# Altium PCB PCB_ESP32-C3-WROOM-02_V1.6_20210209.PcbDoc
Units mil, origin at the board's own origin, x right, y up, seen from the top; angles counter-clockwise.
Board outline 708.66 x 787.4 mil, 4 copper layers (Top, Gnd, Power, Bottom), stack 35.4 mil thick; 45 components, 37 nets, 111 pads, 172 vias.
Unrouted connection lines stored in the file: 147.
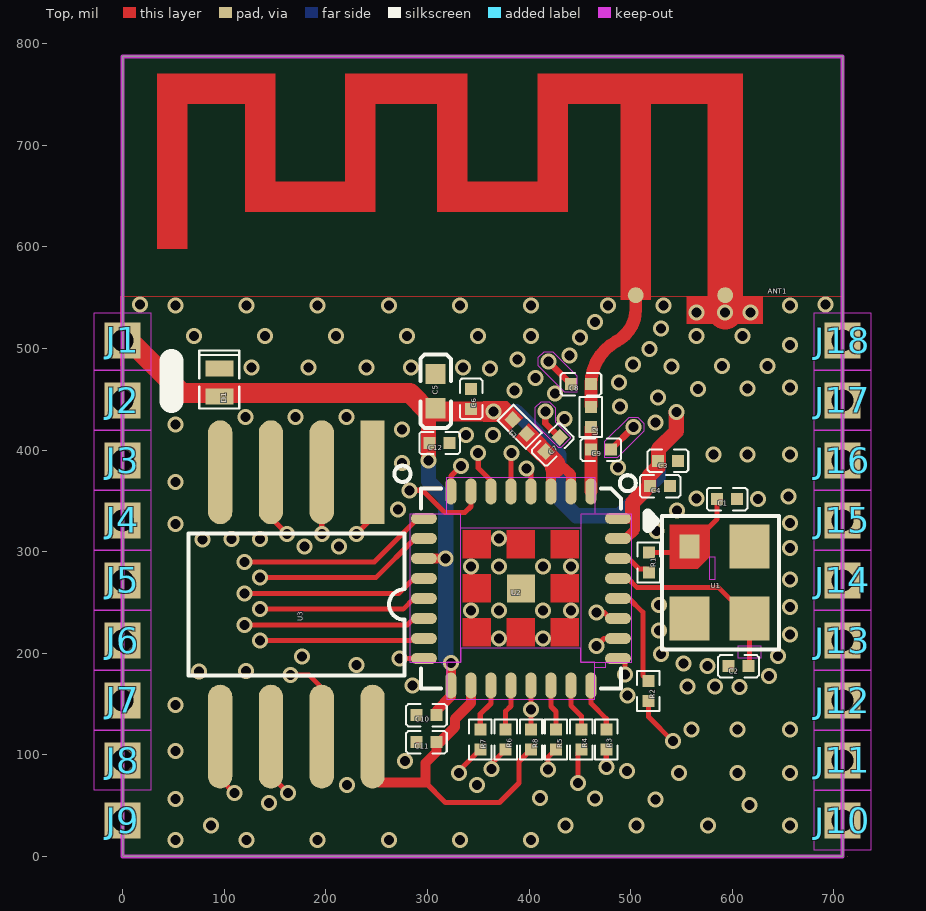
[diagram p0: Top view]
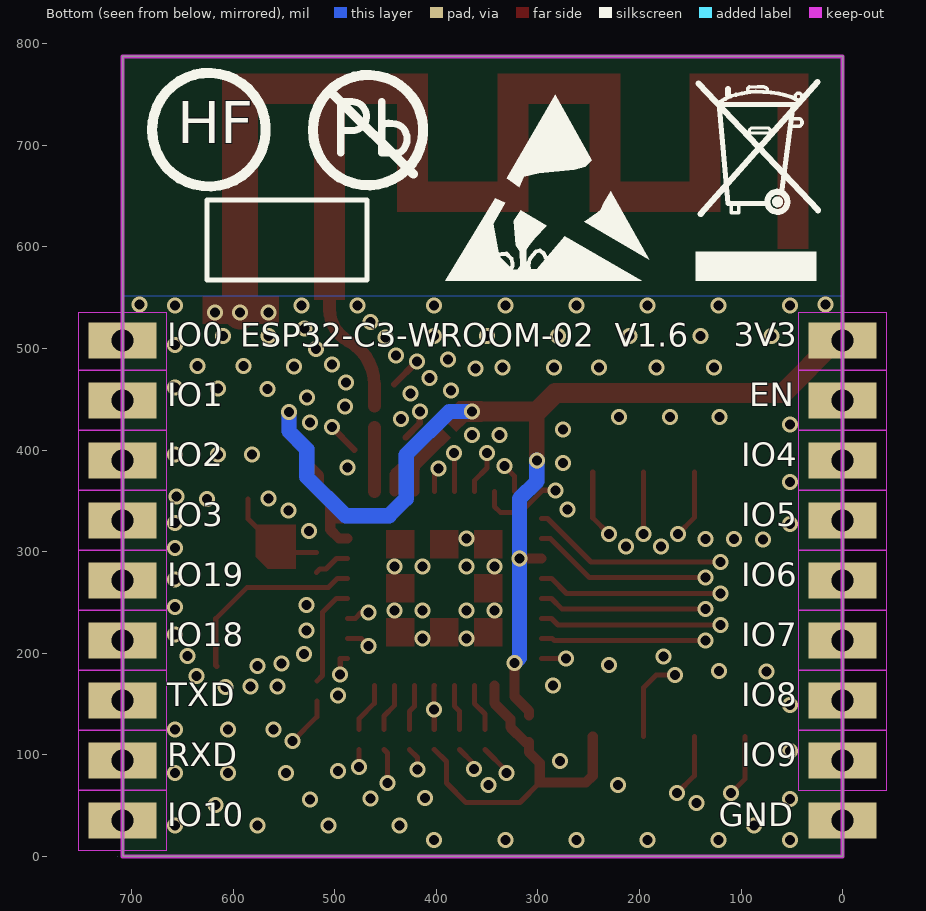
[diagram p1: Bottom view, seen from below]
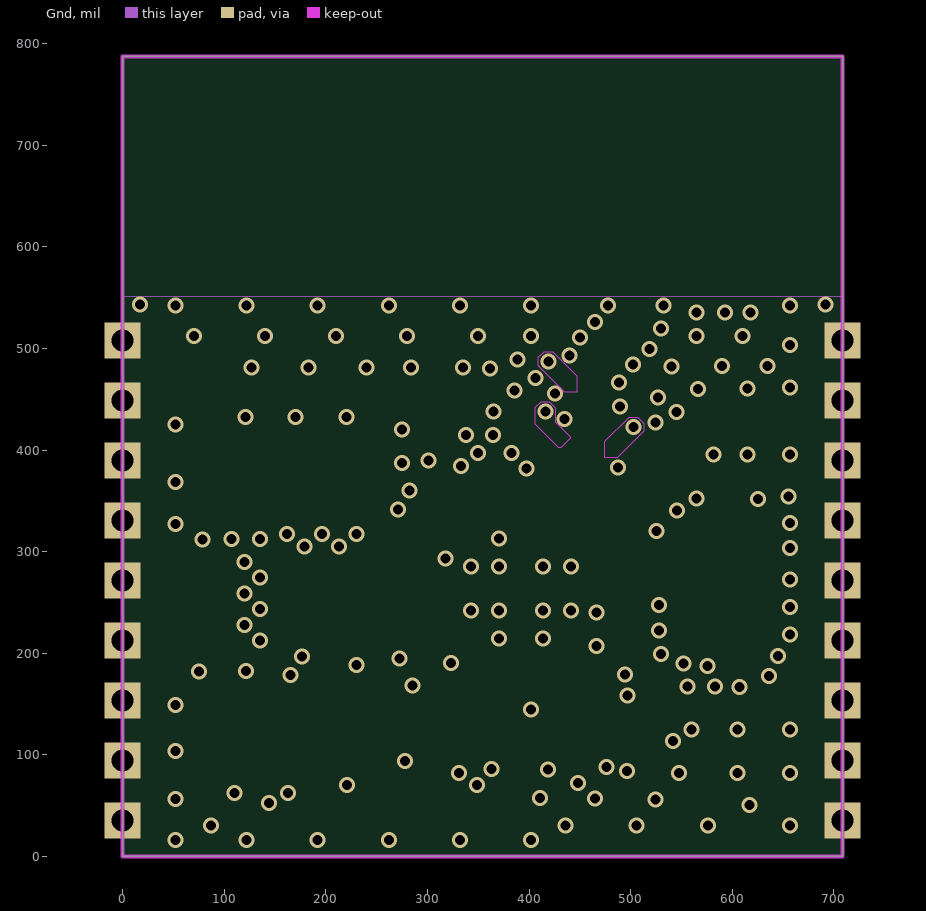
[diagram p2: Gnd]
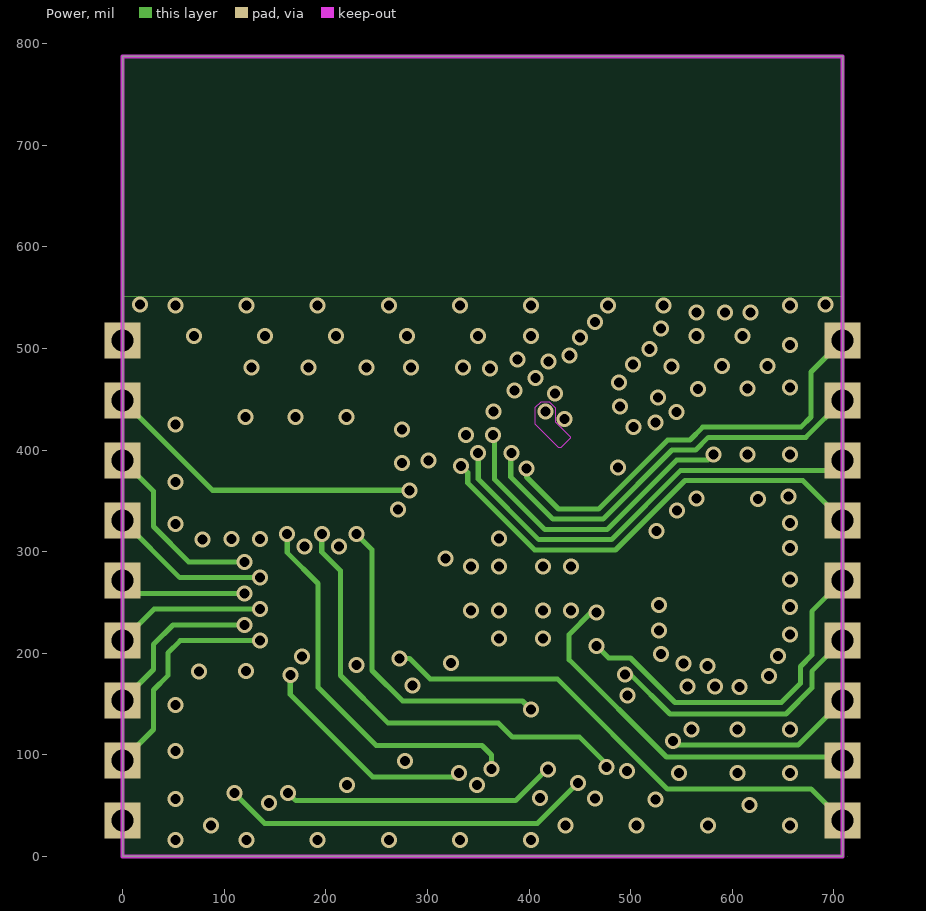
[diagram p3: Power]

## Layer stack, top to bottom
Solder Mask Top: solder mask 0.4, Solder Resist, Dk 3.5
Top: signal copper 1.35
Dielectric 1: dielectric 10, FR-4, Dk 4.3
Gnd: signal copper 1.35
Dielectric2: dielectric 10, FR-4, Dk 4.3
Power: signal copper 1.35
Dielectric3: dielectric 10, FR-4, Dk 4.3
Bottom: signal copper 1.35
Solder Mask Bottom: solder mask 0.4, Solder Resist, Dk 3.5

## Board outline
0,787.4 708.66,787.4 708.66,0 0,0

## Design rules (kind name [scope] priority, off if disabled: settings)
Clearance "Clearance - Net - LNA_IN" [InNet('LNA_IN') OR InNet('RF_ANT')] p1: gap=5 ignorepadtopadclearanceinfootprint=FALSE except(0: Arc-Hole Track-Hole SMDPad-Hole THPad-Hole Via-Hole Fill-Hole Poly-Hole Region-Hole Text-Hole; 10: Fill-Fill Fill-Poly Fill-Region Poly-Poly Poly-Region Region-Region Text-Text; 12.2: Arc-Fill Arc-Poly Arc-Region Track-Fill Track-Poly Track-Region SMDPad-Fill SMDPad-Poly SMDPad-Region THPad-Fill THPad-Poly THPad-Region Via-Fill Via-Poly Via-Region)
Clearance "Clearance - Net - U0RXD" [InNet('U0RXD')] p2: gap=5 ignorepadtopadclearanceinfootprint=FALSE except(0: Arc-Hole Track-Hole SMDPad-Hole THPad-Hole Via-Hole Fill-Hole Poly-Hole Region-Hole Text-Hole; 10: Fill-Fill Fill-Poly Fill-Region Poly-Poly Poly-Region Region-Region Text-Text)
Clearance "Clearance - Default - DEFAULT - Via" [IsVia vs IsVia] p3: gap=6 ignorepadtopadclearanceinfootprint=FALSE
Clearance "Clearance - Default - DEFAULT- SMD" [IsVia vs IsSMTPin] p4: gap=6 ignorepadtopadclearanceinfootprint=FALSE
Clearance "Clearance - Default - DEFAULT - Net" [All] p5: gap=5 ignorepadtopadclearanceinfootprint=FALSE except(0: Arc-Hole Track-Hole SMDPad-Hole THPad-Hole Via-Hole Fill-Hole Poly-Hole Region-Hole Text-Hole; 7.87: SMDPad-SMDPad SMDPad-THPad THPad-THPad; 10: Fill-Fill Fill-Poly Fill-Region Poly-Poly Poly-Region Region-Region Text-Text)
ComponentClearance "ComponentClearance - Default - DEFAULT" [All] p1: gap=6 collisioncheckmode=3 verticalgap=10 showdistances=FALSE
FanoutControl Fanout_Small [(CompPinCount < 5)] p1: bgadir=Out bgaviamode=Centered fanoutstyle=Auto fanoutdirection=OutThenIn viagrid=1 // Fanout_Small (Default Rule)
FanoutControl Fanout_BGA [IsBGA] p2: bgadir=Out bgaviamode=Centered fanoutstyle=Auto fanoutdirection=Alternating viagrid=1 // Fanout_BGA (Default Rule)
FanoutControl Fanout_LCC [IsLCC] p3: bgadir=Out bgaviamode=Centered fanoutstyle=Auto fanoutdirection=Alternating viagrid=1 // Fanout_LCC (Default Rule)
FanoutControl Fanout_SOIC [IsSOIC] p4: bgadir=Out bgaviamode=Centered fanoutstyle=Auto fanoutdirection=Alternating viagrid=1 // Fanout_SOIC (Default Rule)
HoleToHoleClearance "HoleToHoleClearance - Default - DEFAULT" [All] p1: gap=6 allowstackedmicrovias=TRUE
Length "Default Length" [All] p1: maxlimit=50000 minlimit=0
MaxMinImpedance "Default Impedance" [All] p1: minimum=50.00 maximum=150.0
ParallelSegment "Default Parallel Segment Adjasent" [All] p1: limit=1000 gap=200
ParallelSegment "Default Parallel Segment Same Layer" [All] p2: limit=1000 gap=200
PlaneConnect "Default PlaneConnect" [All] p1: planeconnectstyle=Direct reliefexpansion=20 reliefentries=4 reliefconductorwidth=15 reliefairgap=10
PolygonConnect "PolygonConnect - Default SMT" [IsSMTPin] p1: connectstyle=Direct reliefconductorwidth=10 reliefentries=4 polygonreliefangle="45 Angle" airgapwidth=10
PolygonConnect "PolygonConnect - Default Pad" [All] p2: connectstyle=Direct reliefconductorwidth=15 reliefentries=4 polygonreliefangle="45 Angle" airgapwidth=10
RoutingLayers "RoutingLayers - Default - DEFAULT" [All] p1: top layer_v5=TRUE mid layer 1_v5=TRUE mid layer 2_v5=TRUE bottom layer_v5=TRUE
RoutingPriority "RoutingPriority - Default - DEFAULT" [All] p1: routingpriority=3
RoutingTopology "Default Routing Topology" [All] p1: topology=Shortest
RoutingVias "RoutingVias - Default - DEFAULT" [All] p1: holewidth=9.84 width=15.75 viastyle="Through Hole" minholewidth=9.84 minwidth=15.75 maxholewidth=9.84 maxwidth=15.75
SMDToCorner "SMDToCorner - Default - DEFAULT" [All] p1: distance=60000
SolderMaskExpansion [All] p1: expansion=4 istentingtop=FALSE
Width "Default Width" [All] p1: maxlimit=30 minlimit=5 preferedwidth=5
18 further rules are at their usual default settings.

## Components (designator, comment, footprint, x,y, rotation, side; value= is the part's Value field where it differs from the comment)
ANT1 "MINI-ANT-TYPEB" MINI-ANT-TYPEB -15,787.4 r0 top
C1 "C0201" C0201 595,351.7 r0 top
C2 "C0201" C0201 606.2,187.2 r180 top
C3 "C0201" C0201 536.7,389.4 r0 top
C4 "C0201" C0201 529,364.4 r0 top
C5 "C0402" C0402 308,457.87 r90 top
C6 "C0201" C0201 343,450.4 r90 top
C7 "C0201" C0201 423.2,405.4 r45 top
C8 "C0201" C0201 451.06,464.9 r0 top
C9 "C0201" C0201 470.74,400.4 r180 top
C10 "C0201" C0201 299,138.98 r180 top
C11 "C0201" C0201 299,112.4 r180 top
C12 "C0201" C0201 312,406.9 r0 top
D1 "SOD882" SOD882 95.1,466.34 r90 top
J1 "SPAD_1DA" SPAD_1DA 0,507.87 r0 top
J2 "SPAD_1" SPAD_1 0,448.82 r0 top
J3 "SPAD_1" SPAD_1 0,389.76 r0 top
J4 "SPAD_1" SPAD_1 0,330.71 r0 top
J5 "SPAD_1" SPAD_1 0,271.65 r0 top
J6 "SPAD_1" SPAD_1 0,212.6 r0 top
J7 "SPAD_1" SPAD_1 0,153.54 r0 top
J8 "SPAD_1" SPAD_1 0,94.49 r0 top
J9 "SPAD_1C" SPAD_1C 0,35.43 r0 top
J10 "SPAD_1" SPAD_1 708.66,35.43 r0 top
J11 "SPAD_1" SPAD_1 708.66,94.49 r0 top
J12 "SPAD_1" SPAD_1 708.66,153.54 r0 top
J13 "SPAD_1" SPAD_1 708.66,212.6 r0 top
J14 "SPAD_1" SPAD_1 708.66,271.65 r0 top
J15 "SPAD_1" SPAD_1 708.66,330.71 r0 top
J16 "SPAD_1" SPAD_1 708.66,389.76 r0 top
J17 "SPAD_1" SPAD_1 708.66,448.82 r0 top
J18 "SPAD_1EA" SPAD_1EA 708.66,507.87 r0 top
L1 "L0201" L0201 390.82,422.99 r135 top
L2 "L0201" L0201 460.9,432.7 r90 top
R1 "R0201" R0201 517.98,289.37 r90 top
R2 "R0201" R0201 517.5,162.65 r270 top
R3 "R0201" R0201 476,115.15 r270 top
R4 "R0201" R0201 451.5,115.15 r270 top
R5 "R0201" R0201 426.5,115.15 r270 top
R6 "R0201" R0201 377,115.15 r270 top
R7 "R0201" R0201 352,115.15 r270 top
R8 "R0201" R0201 401.97,115.15 r270 top
U1 "XTAL3225" XTAL3225 587.5,269.43 r270 top
U2 "QFN32_0P5_5_B" QFN32_0P5_5_B 392,263.78 r270 top
U3 "SOP8_1P27_6P6" SOP8_1P27_6P6 170.97,248.03 r180 top

## Footprints (in the part's own frame and the unit in brackets; to place one, negate y for a bottom-side part, rotate by r counter-clockwise, add the part's x,y. Pads: shape width x height; smd on the part's side, far side on the other; paste and mask are expansions set on the pad)
C0201 [mm]
  rect 0.3x0.3 smd mask+0.03: 1(-0.25,0) 2(0.25,0)
  silkscreen extent -0.51,-0.28 0.51,0.28
C0402 [mil]
  rect 20x20 smd mask+2: 1(-16.89,0) 2(16.89,0)
  silkscreen extent -36,-15 36,15
L0201 [mm]
  rect 0.3x0.3 smd mask+0.03: 1(-0.25,0) 2(0.25,0)
  silkscreen extent -0.5,-0.28 0.5,0.28
MINI-ANT-TYPEB [mm]
  round 0.4 smd paste-0.2: 1(13.208,-5.969) 2(15.445,-5.969)
  Top region: 12.831,-6.083 13.585,-6.083 13.585,-1.183 15.004,-1.183 15.004,-6.083 15.885,-6.083 15.885,-0.429 10.758,-0.429 10.758,-3.129 9.001,-3.129 9.001,-0.429 5.947,-0.429 5.947,-3.129 4.201,-3.129 4.201,-0.429 1.247,-0.429 1.247,-4.808 2.001,-4.808 2.001,-1.183 3.447,-1.183 3.447,-3.883 6.701,-3.883 6.701,-1.183 8.247,-1.183 8.247,-3.883 11.512,-3.883 11.512,-1.183 12.831,-1.183 12.831,-6.083
QFN32_0P5_5_B [mm]
  oval 0.65x0.28 smd: 1(-2.425,1.75) 2(-2.425,1.25) 3(-2.425,0.75) 4(-2.425,0.25) 5(-2.425,-0.25) 6(-2.425,-0.75) 7(-2.425,-1.25) 8(-2.425,-1.75) 17(2.425,-1.75) 18(2.425,-1.25) 19(2.425,-0.75) 20(2.425,-0.25) 21(2.425,0.25) 22(2.425,0.75) 23(2.425,1.25) 24(2.425,1.75)
  oval 0.28x0.65 smd: 9(-1.75,-2.425) 10(-1.25,-2.425) 11(-0.75,-2.425) 12(-0.25,-2.425) 13(0.25,-2.425) 14(0.75,-2.425) 15(1.25,-2.425) 16(1.75,-2.425) 25(1.75,2.425) 26(1.25,2.425) 27(0.75,2.425) 28(0.25,2.425) 29(-0.25,2.425) 30(-0.75,2.425) 31(-1.25,2.425) 32(-1.75,2.425)
  rect 0.7x0.7 smd: 33(0,0)
  Top region: -0.75,0.75 -1.45,0.75 -1.45,1.45 -0.75,1.45 -0.75,0.75
  Top region: -0.75,-0.35 -1.45,-0.35 -1.45,0.35 -0.75,0.35 -0.75,-0.35
  Top region: -0.75,-1.45 -1.45,-1.45 -1.45,-0.75 -0.75,-0.75 -0.75,-1.45
  Top region: 0.35,-1.45 -0.35,-1.45 -0.35,-0.75 0.35,-0.75 0.35,-1.45
  Top region: 0.75,-0.75 1.45,-0.75 1.45,-1.45 0.75,-1.45 0.75,-0.75
  Top region: 1.45,-0.35 0.75,-0.35 0.75,0.35 1.45,0.35 1.45,-0.35
  Top region: 0.75,1.45 1.45,1.45 1.45,0.75 0.75,0.75 0.75,1.45
  Top region: 0.35,0.75 -0.35,0.75 -0.35,1.45 0.35,1.45 0.35,0.75
  Top keep-out region: -1.85,-1.5 -1.85,-2.775 1.85,-2.775 1.85,-1.5 -1.85,-1.5
  Top keep-out region: 1.5,1.5 1.5,-1.5 1.85,-1.5 1.85,-1.85 2.775,-1.85 2.775,1.85 1.85,1.85 1.85,1.5 1.5,1.5
  Top keep-out region: -2.775,1.85 -1.85,1.85 -1.85,1.5 -1.5,1.5 -1.5,-1.5 -1.85,-1.5 -1.85,-1.85 -2.775,-1.85 -2.775,1.85
  Top keep-out region: -1.85,1.5 1.85,1.5 1.85,2.775 -1.85,2.775 -1.85,1.5
  silkscreen extent -2.83,-2.5 2.5,2.87
R0201 [mm]
  rect 0.3x0.3 smd mask+0.03: 1(-0.25,0) 2(0.25,0)
  silkscreen extent -0.5,-0.28 0.5,0.28
SOD882 [mm]
  rect 0.4x0.7 smd: 1(-0.35,0) 2(0.35,0)
  silkscreen extent -0.65,-0.5 0.8,0.5
SOP8_1P27_6P6 [mil]
  rect 24x102.25 smd: 1(-75,-130.13)
  oval 24x102.25 smd: 2(-25,-130.13) 3(25,-130.13) 4(75,-130.13) 5(75,130.13) 6(25,130.13) 7(-25,130.13) 8(-75,130.13)
  silkscreen extent -113,-137 106,70
SPAD_1 [mm]
  rect 0.9x0.9 / inner rect 0.9x0.9 / far side rect 1.7x0.9 hole 0.55: 1(0,0)
  Top keep-out region: -0.704,0.749 0.704,0.749 0.704,-0.749 -0.704,-0.749 -0.704,0.749
  Bottom keep-out region: -1.105,0.749 1.105,0.749 1.105,-0.749 -1.105,-0.749 -1.105,0.749
SPAD_1C [mm]
  rect 0.9x0.9 / inner rect 0.9x0.9 / far side rect 1.7x0.9 hole 0.55: 1(0,0)
SPAD_1DA [mm]
  rect 0.9x0.9 / inner rect 0.9x0.9 / far side rect 1.7x0.9 hole 0.55: 1(0,0)
  Top keep-out region: -0.704,0.699 0.704,0.699 0.704,-0.749 -0.704,-0.749 -0.704,0.699
  Bottom keep-out region: -1.105,0.699 1.105,0.699 1.105,-0.749 -1.105,-0.749 -1.105,0.699
SPAD_1EA [mm]
  rect 0.9x0.9 / inner rect 0.9x0.9 / far side rect 1.7x0.9 hole 0.55: 1(0,0)
  Top keep-out region: -0.704,0.699 0.704,0.699 0.704,-0.749 -0.704,-0.749 -0.704,0.699
  Bottom keep-out region: -1.105,0.699 1.105,0.699 1.105,-0.749 -1.105,-0.749 -1.105,0.699
XTAL3225 [mm]
  rect 0.6x0.5 smd: 1(-0.9,-0.75)
  rect 1.1x1 smd: 2(0.9,-0.75) 3(0.9,0.75) 4(-0.9,0.75)
  Top region: -1.45,-0.25 -1.45,-1.25 -0.35,-1.25 -0.35,-0.55 -0.65,-0.25 -1.45,-0.25
  silkscreen extent -1.72,-1.8 1.67,1.48

## Via types
v1: diameter 15.75, hole 9.84, Top to Bottom, 172 vias

## Nets (pads, with @x,y where several pads share a name; then routed paths per layer and width w, separated by ;. In a path a pad name is that pad's centre, name@x,y a point inside that pad or via, vN(x,y) a via of type N, cw(c..) or ccw(c..) an arc to the next point about the centre after c; other vN are vias at no path point)
CHIP_EN: J2.1 U2.7 | length 405.6
  Top w5: v1(282.5,360.4) 295.15,360.4 316.9,338.65 336.9,338.65 342.79,344.54 U2.7
  Power w5: J2.1 88.42,360.4 v1(282.5,360.4)
GND: ANT1.2 C1.2 C2.2 C3.2 C4.2 C5.2 C6.2 C7.2 C8.1 C9.1 C10.2 C11.2 C12.2 D1.2 J9.1 U1.2 U1.4 U2.33 U3.4 | length 421.7
  Top w6.3: v1(416.1,437.8) 416.1,426.42 C7.2 ; v1(419.02,487.1) C8.1 ; C9.1 v1(502.78,422.6)
  Top w34: v1(593.06,535.4) ANT1.2
  Power w5: v1(364.56,414.83) 366.09,413.3 366.09,371.27 415.56,321.8 476.9,321.8 545.1,390 576,390 v1(581.5,395.5)
  other v1: 52,16.4 122,16.4 192,16.4 262,16.4 332,16.4 402,16.4 87,30.4 436,30.4 506,30.4 576,30.4 657,30.4 617.2,50.4 144,52.4 524.4,56 52,56.4 464.9,56.8 411,57.3 220.97,70.41 348.8,70.4 547.8,82 605,82 657,82 496.5,83.9 278,93.8 52,103.9 560,124.9 605,124.9 657,124.9 52,148.9 496.7,158.2 607.3,166.9 556,167.3 583,167.4 285.2,168.4 636.1,177.4 75,182.1 121.5,182.4 575.8,187.4 230,188.4 552.1,190.1 176.4,196.6 645,197.4 530,199.5 370.35,214.57 413.65,214.57 657,218.4 527.8,222.4 342.79,242.13 370.35,242.13 413.65,242.13 441.21,242.13 657,245.4 527.7,247.4 657,272.4 342.79,285.43 370.35,285.43 413.65,285.43 441.21,285.43 657,303.4 179,305.3 213.1,305.3 78.4,312.1 107,312.4 135,312.4 370.35,312.99 525.3,320.1 52,327.4 657,328 545.62,340.36 271,341.7 625.5,352 565,352.5 655.5,354.4 52,368.4 487.38,382.64 275,387.4 615,395.5 657,395.5 337.9,414.6 275,420.4 52,424.9 524.4,427 434.7,430.8 121,432.4 170,432.4 220.1,432.4 489.7,443 527.1,451.5 425.4,455.6 385.7,458.5 566.18,460.22 614.97,460.76 657,461.4 488.7,466.3 406.4,470.9 361.45,480.04 126.6,481.4 183,481.4 240,481.4 284,481.4 335,481.4 540,482.4 589.82,482.58 634.9,482.6 502.4,484.1 388.43,489.28 439.64,492.85 518.4,499.3 657,503.4 450,511 70,512.4 140,512.4 210,512.4 280,512.4 350,512.4 402,512.4 565,512.4 610,512.4 529.8,519.4 464.8,526 565,535.4 617.8,535.4 52,542.4 122,542.4 192,542.4 262,542.4 332,542.4 402,542.4 477.5,542.4 532.5,542.4 657,542.4 17,543.26 692,543.26
GPIO0: J18.1 U2.4 | length 451.6
  Top w5: v1(397.6,381.9) 401.84,377.66 U2.4
  Power w5: v1(397.6,381.9) 397.6,373.4 429,342 468.5,342 536.5,410 558.5,410 571,422.5 667.5,422.5 677.5,432.5 677.5,476.71 J18.1
GPIO1: J17.1 U2.5 | length 453.9
  Top w5: U2.5 382.16,396.56 v1(382.5,396.9)
  Power w5: v1(382.5,396.9) 382,396.9 382,373.5 423.5,332 472.8,332 540.8,400 564,400 576.5,412.5 672.34,412.5 J17.1
GPIO2: J16.1 U2.6 | length 483.9
  Top w5: v1(350,396.9) 350,382.34 362.47,369.87 U2.6
  Power w5: v1(350,396.9) 350,371.46 409.66,311.8 481.05,311.8 549.25,380 698.9,380 J16.1
GPIO3: J15.1 U2.8 | length 489.7
  Top w5: U2.8 323.1,374.5 v1(333,384.4)
  Power w5: v1(333,384.4) 339.71,377.69 339.71,367.55 405.56,301.7 485.1,301.7 553.4,370 669.37,370 J15.1
GPIO4: J3.1 U2.9 | length 376
  Top w5: v1(120,289.9) 247.7,289.9 290.48,332.68 U2.9
  Power w5: J3.1 30.3,359.46 30.3,324.7 65.1,289.9 v1(120,289.9)
GPIO5: J4.1 U2.10 | length 335.8
  Top w5: v1(135,274.4) 249.1,274.4 287.69,312.99 U2.10
  Power w5: J4.1 56.31,274.4 v1(135,274.4)
GPIO6: J5.1 U2.12 | length 307.9
  Top w5: v1(120,258.9) 271.7,258.9 286.42,273.62 U2.12
  Power w5: J5.1 12.75,258.9 v1(120,258.9)
GPIO7: J6.1 U2.13 | length 313.7
  Top w5: v1(135,243.4) 276.1,243.4 286.64,253.94 U2.13
  Power w5: J6.1 30.8,243.4 v1(135,243.4)
GPIO8: J7.1 U2.14 | length 344.5
  Top w5: v1(120,227.9) 280.1,227.9 286.45,234.25 U2.14
  Power w5: J7.1 30.4,183.94 30.4,208.8 49.5,227.9 v1(120,227.9)
GPIO9: J8.1 U2.15 | length 382.2
  Top w5: v1(135,212.4) 283.8,212.4 285.97,214.57 U2.15
  Power w5: J8.1 30.4,124.89 30.4,163.8 44.5,177.9 44.5,200.3 56.6,212.4 v1(135,212.4)
GPIO10: J10.1 U2.16 | length 526.2
  Top w5: v1(272.5,194.78) 272.6,194.88 U2.16
  Power w5: v1(272.5,194.78) 282.52,194.78 302.5,174.8 427.75,174.8 536.15,66.4 677.69,66.4 J10.1
GPIO18: J13.1 U2.25 | length 292.8
  Top w5: U2.25 494.5,194.88 v1(494.5,178.9)
  Power w5: v1(494.5,178.9) 500.1,178.9 538.7,140.3 652.9,140.3 678.3,165.7 678.3,182.24 J13.1
GPIO19: J14.1 U2.26 | length 374
  Top w5: v1(466.5,207.3) 473.77,214.57 U2.26
  Power w5: v1(466.5,207.3) 478.4,195.4 499.8,195.4 543.7,151.5 648.2,151.5 667.1,170.4 667.1,187 678.3,198.2 678.3,241.29 J14.1
LNA_IN: C9.2 L2.1 U2.1 | length 63.6
  Top w11: L2.1@460.9,422.3 L2.1
  Top w12.6: U2.1 L2.1@460.9,422.3
N5334642: C7.1 L1.1 U2.2 U2.3 | length 106.5
  Top w10: U2.3 421.53,382.38 425.8,382.38 434.89,382.38 441.21,376.05 U2.2
  Top w12: L1.1@398.48,415.34 398.48,413.66 405.29,406.84
  Top w20: 405.29,406.84 425.8,386.33 425.8,382.38
N5601133: C2.1 U1.3 U2.29 | length 193.2
  Top w5: U2.29 497.38,273.62 506.1,264.9 586.12,264.9 U1.3 617.03,188.19 C2.1
N15917924: R2.1 U2.28 | length 100.3
  Top w5: U2.28 498.37,253.94 511.99,240.32 511.99,178 R2.1
N16606710: R7.1 U2.19 | length 47.7
  Top w5: R7.1 352,140.18 362.47,150.65 U2.19
N16606714: R6.1 U2.20 | length 45.5
  Top w5: R6.1 377,142.99 382.16,148.15 U2.20
N16606906: R5.1 U2.22 | length 45.4
  Top w5: U2.22 421.53,147.62 426.5,142.65 R5.1
N16606910: R3.1 U2.24 | length 49.6
  Top w5: U2.24 460.9,150.75 476,135.65 R3.1
N16606914: R4.1 U2.23 | length 47.6
  Top w5: U2.23 441.21,148.44 451.5,138.15 R4.1
N16619403: C1.1 R1.2 U1.1 | length 101.9
  Top w5: R1.2 552.33,299.21 U1.1@559.01,305.89 ; U1.1 U1.1@559.01,305.89 ; C1.1 585.16,332.04 U1.1@559.01,305.89
N16918436: R1.1 U2.30 | length 36.2
  Top w5: U2.30 498.19,293.31 508.6,282.9 514.61,282.9 R1.1
RF_ANT: ANT1.1 C8.2 L2.2 | length 216.4
  Top w11: L2.2 L2.2@460.9,443.5
  Top w12.6: L2.2@460.9,443.5 460.9,464.8 cw(c509.21,464.6) C8.2 ; ANT1.1 505,538.58 ; C8.2 cw(c509.21,464.6) 486.22,507.09 ; C8.2 cw(c509.21,464.6) 486.22,507.09 ; 486.22,507.09 ccw(c469.2,538.58) 505,538.58 ; 486.22,507.09 ccw(c469.2,538.58) 505,538.58
SPICLK: R5.2 U3.6 | length 357
  Top w5: U3.6 145.97,79.43 v1(163,62.4) ; v1(418.5,85.4) 418.5,97.31 R5.2
  Power w5: v1(163,62.4) 170.5,54.9 386.6,54.9 417.1,85.4 v1(418.5,85.4)
SPICS0: R8.1 U2.21 U3.1 | length 424.1
  Top w5: v1(230,317.4) 245.97,333.37 U3.1 ; U2.21 402,168.15 v1(402,144.4) ; R8.1 v1(402,144.4)
  Power w5: v1(230,317.4) 245.5,301.9 245.5,183 275.6,152.9 393.5,152.9 v1(402,144.4)
SPID: R4.2 U3.5 | length 462.6
  Top w5: U3.5 95.97,76.43 v1(110.1,62.3) ; v1(448,72.4) 448,101.81 R4.2
  Power w5: v1(110.1,62.3) 139.9,32.5 408.1,32.5 v1(448,72.4)
SPIHD: R7.2 U3.7 | length 336.5
  Top w5: v1(165,178.4) 183.6,178.4 195.97,166.03 U3.7 ; v1(331,81.9) 331,84.31 R7.2
  Power w5: v1(165,178.4) 165,159.4 246.2,78.2 327.3,78.2 v1(331,81.9)
SPIQ: R3.2 U3.2 | length 525.6
  Top w5: U3.2 195.97,318.43 v1(196,317.4) ; v1(476,88.1) R3.2
  Power w5: v1(196,317.4) 196,299.7 214.5,281.2 214.5,178 261.3,131.2 369.9,131.2 383.7,117.4 449.8,117.4 476,91.2 v1(476,88.1)
SPIWP: R6.2 U3.3 | length 468.3
  Top w5: U3.3 145.97,333.43 v1(162,317.4) ; v1(363,85.9) 363,91.31 R6.2
  Power w5: v1(162,317.4) 162,299 192.3,268.7 192.3,166.5 249.5,109.3 353.6,109.3 363,99.9 v1(363,85.9)
U0RXD: J11.1 U2.27 | length 394.4
  Top w5: v1(466.5,240) 474,240 479.75,234.25 U2.27
  Power w5: v1(466.5,240) 461,240 439.5,218.5 439.5,193.6 535.2,97.9 705.25,97.9 J11.1
U0TXD: J12.1 R2.2 | length 236.4
  Top w5: R2.2 517.5,137.4 v1(541.5,113.4)
  Power w5: v1(541.5,113.4) v1@545.36,109.54 ; v1@545.36,109.5 664.62,109.5 J12.1
VDD33: C3.1 C4.1 C5.1 C6.1 C10.1 C12.1 D1.1 J1.1 L1.2 U2.11 U2.17 U2.31 U2.32 | length 1369.9
  Top w10: D1.1@90.9,456.07 91.59,456.07 D1.1 ; U2.11 v1(318,293.3) ; C5.1@308,437.87 C5.1 ; C5.1@308.03,437.9 C6.1@341.3,437.9 ; C10.1 308.84,143.25 323.1,157.51 U2.17 v1(323.1,190.4) ; U2.31 495.69,312.99 504.4,321.7 504.4,332.68 ; U2.32 504.4,332.68 ; 504.4,350.63 504.4,332.68
  Top w12: v1(365,437.9) 375.91,437.9 L1.2@383.16,430.65 ; C4.1@518.17,367.7 519.16,366.72 C4.1 ; C3.1 526.86,394.36 C3.1@527.5,395
  Top w15: v1(301,389.9) C5.1@301,437.87 ; 501.8,335.4 501.8,348.03 504.4,350.63 518.17,364.4 518.17,367.7 518.17,374.27 527.5,383.6 527.5,395 527.5,401 545,418.5 v1(545,437.5)
  Top w20: J1.1 6.67,507.87 58.47,456.07 90.9,456.07 282.86,456.07 C5.1@301.03,437.9 ; C5.1@301.03,437.9 v1(365,437.9) 341.3,437.9 C5.1@301.03,437.9
  Bottom w15: v1(301,389.9) 301,369.14 318,352.14 v1(318,293.3) 318,195.4 318.1,195.4 v1(323.1,190.4) ; v1(365,437.9) 387.09,437.9 429.6,395.39 429.6,352.13 446.33,335.4 489.17,335.4 527.5,373.73 527.5,401 545,418.5 v1(545,437.5)
VDD_SPI: C11.1 R8.2 U2.18 U3.8 | length 355.3
  Top w5: 298.1,72.7 317.6,53.2 370.9,53.2 390,72.3 390,93.34 R8.2
  Top w10: U3.8 245.97,79.43 252.7,72.7 298.1,72.7 298.1,92 308.84,102.74 C11.1 312.14,112.4 327,127.26 327,135.15 342.79,150.94 U2.18

## Polygon pours and split planes (outlines as drawn)
GND on Bottom (solid, remove dead copper, pour order 0): 0,551.18 708.66,551.18 708.66,0 0,0
GND on Gnd (solid, remove dead copper, pour order 1): 0,551.18 708.66,551.18 708.66,0 0,0
GND on Power (solid, remove dead copper, pour order 2): 0,551.18 708.66,551.18 708.66,0 0,0
GND on Top (solid, remove dead copper, pour order 3): -1.97,551.18 708.66,551.18 708.66,0 0,0

## Keep-outs
Top:
  region: 447.1,456.96 435.21,456.96 409.15,483.02 409.15,491.19 414.93,496.97 423.16,496.97 447.1,473.03 447.1,456.96
  region: 431.04,402.04 429.29,402.04 406.2,425.15 406.2,441.9 412,447.7 420.1,447.7 426,441.8 426,427.7 440.55,413.15 440.55,411.55 431.04,402.04
  region: 606.1,207.4 627.9,207.4 627.9,195.1 606.1,195.1 606.1,207.4
  region: 464.83,185.5 464.83,190.98 475,190.98 475,185.5 464.83,185.5
  region: 578,294.78 582.6,294.78 582.6,272.4 578,272.4 578,294.78
  region: 474.65,392.5 474.65,408.5 498.65,432.5 506.8,432.5 512.74,426.56 512.74,418.49 486.75,392.5 474.65,392.5
Gnd:
  region: 431.04,402.04 429.29,402.04 406.2,425.15 406.2,441.9 412,447.7 420.1,447.7 426,441.8 426,427.7 440.55,413.15 440.55,411.55 431.04,402.04
  region: 447.1,456.96 435.21,456.96 409.15,483.02 409.15,491.19 414.93,496.97 423.16,496.97 447.1,473.03 447.1,456.96
  region: 474.65,392.5 474.65,408.5 498.65,432.5 506.8,432.5 512.74,426.56 512.74,418.49 486.75,392.5 474.65,392.5
Power:
  region: 431.04,402.04 429.29,402.04 406.2,425.15 406.2,441.9 412,447.7 420.1,447.7 426,441.8 426,427.7 440.55,413.15 440.55,411.55 431.04,402.04
Keep-Out Layer:
  the board outline again, w3.94

## Other copper
Top:
  region net GND: 555,551.18 555,524.4 630,524.4 630,551.18 555,551.18
  region net VDD33: 380.19,417.79 370.08,427.9 354.93,427.9 354.93,447.9 378.39,447.9 394.35,431.94 380.19,417.79
  region net N5334642: 402.79,395.19 385.69,412.29 399.84,426.44 416.94,409.34 402.79,395.19
Multi-Layer:
  lines w1: 0,0 0.03,0 ; 708.66,787.4 708.69,787.4 ; 713.36,0.1 713.39,0.1 ; 718.46,35.2 718.49,35.2 ; 0,787.4 0.03,787.4 0,787.4

## Silkscreen, mask and mechanical layers (free items; w line width, h text height)
Silkscreen Top:
  lines w23.62: 48.23,448.03 48.23,487.4
Silkscreen Bottom:
  circle w5.5: c64.05,644.3 r2.6
  circle w10: c623.75,715.3 r55.91
  circle w6: c64.15,644.3 r9.9
  circle w10: c467.15,714.9 r54.3
  region: 282.92,749.8 246.83,685.47 253.53,679.07 264.3,675.85 299.24,672.36 314.08,668.87 318.45,658.69 330.67,667.41 282.92,749.8
  region: 341.8,647.87 332.23,643.62 343.92,622.83 338.02,590.84 325.26,577.85 320.42,577.49 317.23,581.51 317.7,595.45 321.95,601.69 323.61,625.79 316.64,635.94 291.47,620.92 302.39,608.94 308.33,601.33 311.35,597.15 311.49,584.7 310.68,581.57 307.7,577.99 301.14,578.14 273.74,610.18 197.75,566.77 390.92,566.77 341.8,647.87
  region: 144.55,595.2 26.15,595.2 26.15,566.5 144.55,566.5 144.55,595.2
  region: 190.22,587.19 228.24,654.68 235.47,642.45 238.25,636.52 241.03,633.96 254.3,624.82 190.22,587.19
  lines w3: 90.05,717 74.39,717 ccw(c73.94,714.47) 73.79,711.9 89.65,711.9 ccw(c89.58,714.24) 90.15,716.5
  lines w3.5: 40.05,748.3 41.15,750.4 42.55,751.2 44.65,751.1 45.65,750.2 46.45,749.3 46.55,748.2 46.55,746.1 ; 48.85,726 42.25,726 ccw(c43.8,722.45) 42.25,718.9 49.55,718.9 ; 74.15,752.5 74.15,755.5 75.25,756.5 77.95,757.7 83.75,757.7 91.85,757.3 93.25,756.1 93.55,753.1 ; 102.05,640.6 102.05,633.5 109.75,633.5 109.75,640.3
  lines w4: 43.65,743.8 44.85,744.6 50.55,747.3 57.05,749.4 63.25,750.8 70.65,752 77.95,752.5 85.55,752.7 91.35,752.2 99.05,751.1 104.95,749.7 110.45,748.2 115.45,745.7 122.15,741.6 ; 292.32,589.45 294.35,593.9 298.04,596.29 301.91,595.52 307.33,588.91 308.96,584.79 309.34,581.57 308.53,578.18 ; 325.89,579.08 325.04,581.09 324.84,583.98 326.18,588.62 330.88,593.18 335.19,593.03 337.15,592.4
  lines w5: 46.95,740 118.45,740 ; 48.85,738.8 59.65,656.5 ; 77.15,642.6 112.95,642.6 121.85,741.6 ; 468.28,567.34 468.28,646.08 625.76,646.08 625.76,567.34 468.28,567.34
  lines w6: 24.15,636 142.05,760.9 ; 24.65,762.4 139.65,632.5 ; 112.85,749.1 112.85,755.3
  lines w7: 453.65,720 453.65,742.9 ; 494,692.4 494,714.4 ; 494,714.4 494,742.9 482.97,742.9 ccw(c482.97,728.65) 482.97,714.4 494,714.4 ; 436.61,692.4 cw(c444.66,706.24) 436.61,720.07 cw(c445.38,696.75) 453.65,720.25 453.65,692.4 436.61,692.4
  lines w9: 422.46,671.67 501.44,749.96
  text "HF" at 654.85,688 h70.87
  text "3V3" at 107,494.09 h40
  text "ESP32-C3-WROOM-02  V1.6" at 593,493.9 h40
  text "IO0" at 665,494.09 h40
  text "EN" at 92,435.04 h40
  text "IO1" at 665,435.04 h40
  text "IO4" at 100,375.98 h40
  text "IO2" at 665,375.98 h40
  text "IO5" at 100,316.93 h40
  text "IO3" at 665,316.93 h40
  text "IO6" at 100,257.87 h40
  text "IO19" at 665,257.87 h40
  text "IO7" at 100,198.82 h40
  text "IO18" at 665,198.82 h40
  text "IO8" at 100,139.76 h40
  text "TXD" at 665,139.76 h40
  text "IO9" at 100,80.71 h40
  text "RXD" at 665,80.71 h40
  text "GND" at 122,21.65 h40
  text "IO10" at 665,21.65 h40
Paste Mask Top:
  lines w23.62: 48.23,423.23 48.23,30.71 660.43,30.71 660.43,511.81 530.51,511.81 ; 48.23,511.81 424.21,511.81
Solder Mask Top:
  lines w23.62: 48.23,423.23 48.23,30.71 660.43,30.71 660.43,511.81 530.51,511.81 ; 48.23,511.81 424.21,511.81
Layer_125:
  lines w1: -16.24,17.7 -16.21,17.7 ; -15.84,53.2 -15.81,53.2 ; 0,0 0.03,0 ; 33.46,34 33.49,34 ; 98.11,-160.25 604.04,-160.25 ; 98.72,-260.25 604.04,-260.25 ; 98.72,-230.25 604.04,-230.25 ; 99.04,-200.25 604.04,-200.25 ; 152.79,-290.25 152.79,-200.25 ; 354.04,-290.25 354.04,-260.25 ; 439.04,-260.25 439.04,-230.25 ; 690.3,551.3 690.33,551.3 ; 708.66,787.4 708.69,787.4 ; 716.46,330 716.49,330 ; 718.16,270.2 718.19,270.2 ; 98.11,-290.25 98.11,-120.25 604.04,-120.25 604.04,-290.25 98.11,-290.25
  lines w5: -231.74,0 -20,0 ; -231.74,787.4 -20,787.4 ; -211.74,344.95 -211.74,0 ; -211.74,442.45 -211.74,787.4 ; -157.94,17.7 -36.24,17.7 ; -157.94,53.2 -35.84,53.2 ; -137.94,-52.3 -137.94,17.7 ; -137.94,123.2 -137.94,53.2 ; -70,-40 0,-40 ; 0,-60 0,-20 ; 0,807.4 0,878.27 ; 33.46,-60 33.46,14 ; 103.46,-40 33.46,-40 ; 251.6,858.27 0,858.27 ; 457.06,858.27 708.66,858.27 ; 708.66,807.4 708.66,878.27 ; 710.3,551.3 843.3,551.3 ; 728.66,787.4 843.3,787.4 ; 733.36,0.1 844.16,0.1 ; 736.46,330 843.5,330 ; 738.16,270.2 843.5,270.2 ; 738.46,35.2 844.16,35.2 ; 823.3,481.3 823.3,551.3 ; 823.3,857.4 823.3,787.4 ; 823.5,200.2 823.5,270.2 ; 823.5,400 823.5,330 ; 824.16,-69.9 824.16,0.1 ; 824.16,105.2 824.16,35.2 ; -211.74,0 -201.74,50 -221.74,50 -211.74,0 ; -211.74,787.4 -221.74,737.4 -201.74,737.4 -211.74,787.4 ; -137.94,17.7 -147.94,-32.3 -127.94,-32.3 -137.94,17.7 ; -137.94,53.2 -127.94,103.2 -147.94,103.2 -137.94,53.2 ; 0,-40 -50,-30 -50,-50 0,-40 ; 0,858.27 50,848.27 50,868.27 0,858.27 ; 33.46,-40 83.46,-50 83.46,-30 33.46,-40 ; 708.66,858.27 658.66,868.27 658.66,848.27 708.66,858.27 ; 823.3,551.3 813.3,501.3 833.3,501.3 823.3,551.3 ; 823.3,787.4 833.3,837.4 813.3,837.4 823.3,787.4 ; 823.5,270.2 813.5,220.2 833.5,220.2 823.5,270.2 ; 823.5,330 833.5,380 813.5,380 823.5,330 ; 824.16,0.1 814.16,-49.9 834.16,-49.9 824.16,0.1 ; 824.16,35.2 834.16,85.2 814.16,85.2 824.16,35.2
  text "18.0mm" at 281.6,839.52 h25
  text "6.0mm" at 765.5,664.2 h25
  text "20.0mm" at -289.58,374.95 h25
  text "1.5mm" at 783.56,284.2 h25
  text "0.9mm" at -180.04,138.2 h25
  text "0.9mm" at 781.96,113.2 h25
  text "0.85mm" at 114.56,-55.1 h25
  text "ESPRESSIF SYSTEMS" at 114.04,-147.75 h25
  text "ÀÖöÎÐÅÏ¢¿Æ¼¼£¨ÉÏº££©¹É·ÝÓÐÏÞ¹«Ë¾" at 111.54,-185.25 h20
  text "Title" at 106.54,-220.25 h20
  text "ESP32-C3-WROOM-02" at 171.54,-220.25 h20
  text "Task" at 104.04,-250.25 h20
  text "Rev" at 449.04,-250.25 h20
  text "1.6" at 534.04,-250.25 h20
  text "Date" at 106.54,-280.25 h20
  text "Tue, Feb 09, 2021" at 171.54,-280.25 h20
  text "Proprietary" at 371.54,-280.25 h20